# Altium PCB BMS breakout.PcbDoc
Units mm, origin at the board's own origin, x right, y up, seen from the top; angles counter-clockwise.
Board outline 83.46 x 150.11 mm, 2 copper layers (Top Layer, Bottom Layer); 55 components, 98 nets, 236 pads, 42 vias.
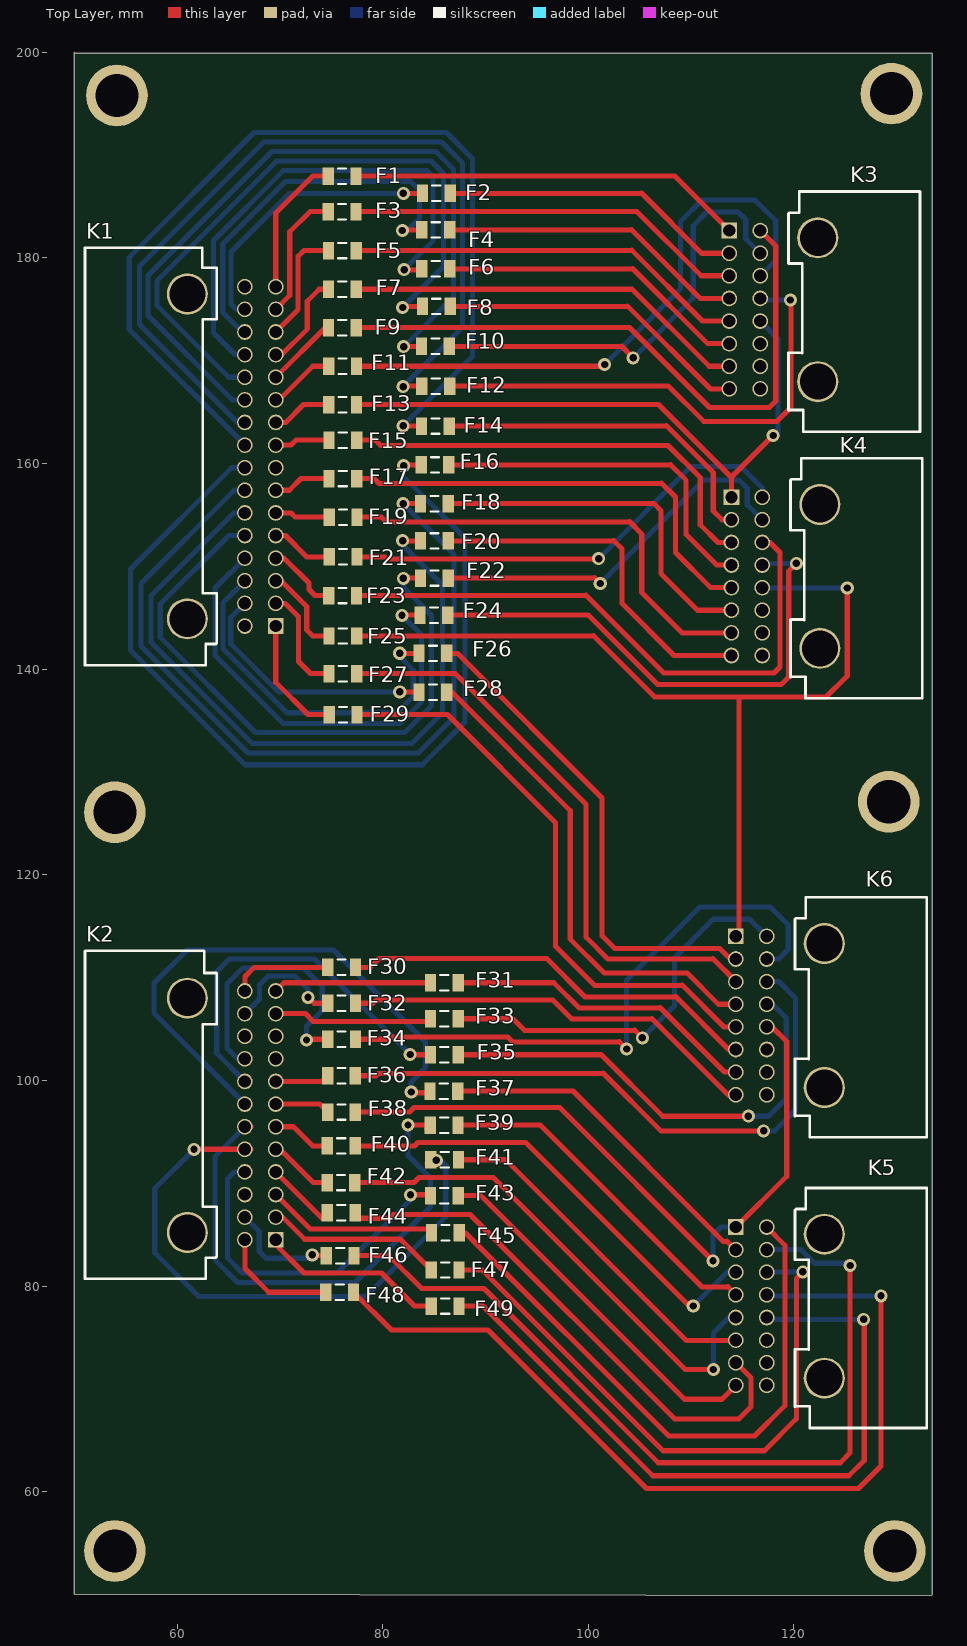
[diagram p0: Top Layer view]
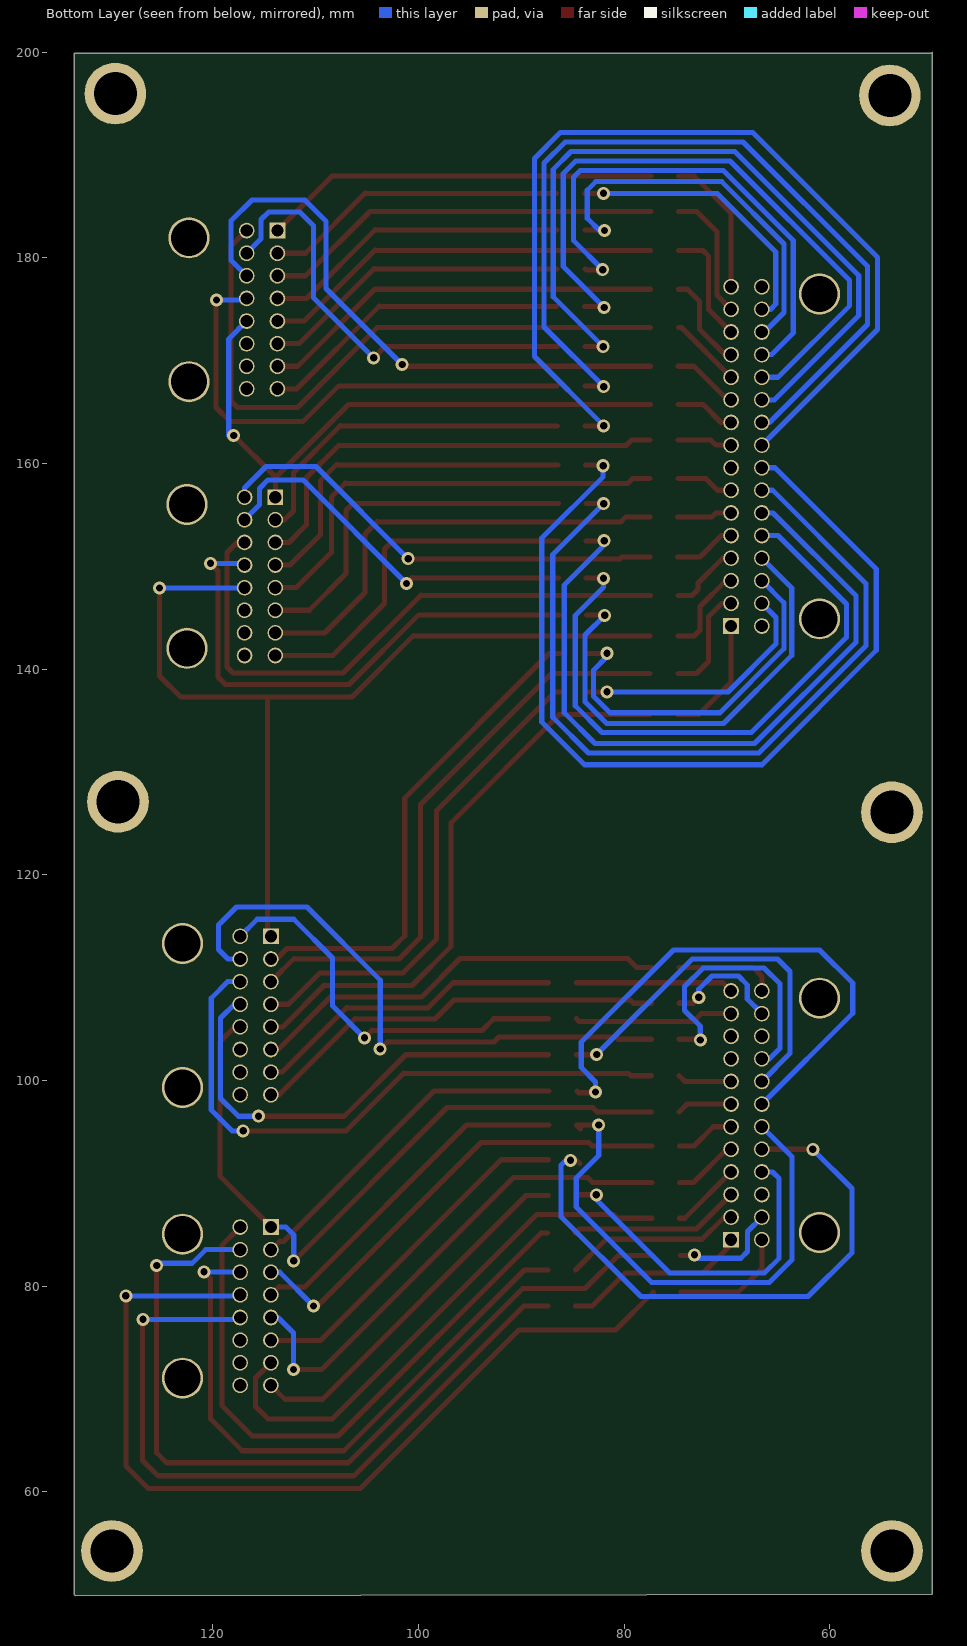
[diagram p1: Bottom Layer view, seen from below]

## Layer stack, top to bottom
Top Solder: solder mask 0.0102, Solder Resist, Dk 3.5
Top Layer: signal copper 0.0356
Dielectric 1: dielectric 0.32, FR-4, Dk 4.8
Bottom Layer: signal copper 0.0356
Bottom Solder: solder mask 0.0102, Solder Resist, Dk 3.5

## Board outline
50.013,50.013 50.013,200 50.114,199.898 133.477,199.898 133.477,49.987 133.375,49.886

## Design rules (kind name [scope] priority, off if disabled: settings)
Clearance [All] p1: gap=0.254 ignorepadtopadclearanceinfootprint=FALSE except(0: Arc-Hole Track-Hole SMDPad-Hole THPad-Hole Via-Hole Fill-Hole Poly-Hole Region-Hole Text-Hole; 0.152: Arc-THPad Track-THPad)
HoleSize [All] p1: absolutevalues=TRUE maxlimit=4.2 minlimit=0.025 maxpercent=80.000 minpercent=20.000
PolygonConnect [All] p1: connectstyle=Relief reliefconductorwidth=0.254 reliefentries=4 polygonreliefangle="90 Angle" airgapwidth=0.254
RoomDefinition Connectors [InComponentClass('Connectors')] p1: confinementstyle=ConfineIn formatcopy=TRUE lockcomponents=FALSE outline 133.045,50 50.013,50 50.013,199.898 133.045,199.898
RoutingVias [All] p1: holewidth=0.711 width=1.27 viastyle="Through Hole" minholewidth=0.711 minwidth=1.27 maxholewidth=0.711 maxwidth=1.27
SolderMaskExpansion [All] p1: expansion=0.102
Width [All] p1: maxlimit=0.5 minlimit=0.254 preferedwidth=0.254 minimp=50.000000 maximp=50.000000 favimp=50.000000
29 further rules are at their usual default settings.

## Components (designator, comment, footprint, x,y, rotation, side; value= is the part's Value field where it differs from the comment)
F1 "Fuse 1" C1206 76.048,187.96 r0 top
F2 "Fuse 1" C1206 85.217,186.284 r0 top
F3 "Fuse 1" C1206 76.048,184.506 r0 top
F4 "Fuse 1" C1206 85.166,182.728 r0 top
F5 "Fuse 1" C1206 76.073,180.721 r0 top
F6 "Fuse 1" C1206 85.166,178.943 r0 top
F7 "Fuse 1" C1206 76.073,176.962 r0 top
F8 "Fuse 1" C1206 85.217,175.285 r0 top
F9 "Fuse 1" C1206 76.073,173.228 r0 top
F10 "Fuse 1" C1206 85.137,171.399 r0 top
F11 "Fuse 1" C1206 76.098,169.469 r0 top
F12 "Fuse 1" C1206 85.166,167.538 r0 top
F13 "Fuse 1" C1206 76.098,165.735 r0 top
F14 "Fuse 1" C1206 85.137,163.652 r0 top
F15 "Fuse 1" C1206 76.124,162.281 r0 top
F16 "Fuse 1" C1206 85.09,159.868 r0 top
F17 "Fuse 1" C1206 76.124,158.547 r0 top
F18 "Fuse 1" C1206 85.039,156.108 r0 top
F19 "Fuse 1" C1206 76.149,154.788 r0 top
F20 "Fuse 1" C1206 85.039,152.476 r0 top
F21 "Fuse 1" C1206 76.149,150.927 r0 top
F22 "Fuse 1" C1206 85.039,148.869 r0 top
F23 "Fuse 1" C1206 76.098,147.168 r0 top
F24 "Fuse 1" C1206 84.988,145.263 r0 top
F25 "Fuse 1" C1206 76.124,143.231 r0 top
F26 "Fuse 1" C1206 84.887,141.529 r0 top
F27 "Fuse 1" C1206 76.124,139.573 r0 top
F28 "Fuse 1" C1206 84.887,137.77 r0 top
F29 "Fuse 1" C1206 76.153,135.585 r0 top
F30 "Fuse 1" C1206 76,111 r0 top
F31 "Fuse 1" C1206 86,109.5 r0 top
F32 "Fuse 1" C1206 76,107.5 r0 top
F33 "Fuse 1" C1206 86,106 r0 top
F34 "Fuse 1" C1206 76,104 r0 top
F35 "Fuse 1" C1206 86,102.5 r0 top
F36 "Fuse 1" C1206 75.997,100.457 r0 top
F37 "Fuse 1" C1206 85.95,98.958 r0 top
F38 "Fuse 1" C1206 75.997,96.926 r0 top
F39 "Fuse 1" C1206 85.979,95.656 r0 top
F40 "Fuse 1" C1206 75.971,93.624 r0 top
F41 "Fuse 1" C1206 86.03,92.278 r0 top
F42 "Fuse 1" C1206 75.946,90.068 r0 top
F43 "Fuse 1" C1206 86.004,88.798 r0 top
F44 "Fuse 1" C1206 75.971,87.122 r0 top
F45 "Fuse 1" C1206 86.106,85.166 r0 top
F46 "Fuse 1" C1206 75.87,82.956 r0 top
F47 "Fuse 1" C1206 86.081,81.559 r0 top
F48 "Fuse 1" C1206 75.819,79.4 r0 top
F49 "Fuse 1" C1206 86.081,78.054 r0 top
K1 "1318745-2" 1318745-2 66.6,144.2 r180 top
K2 "1318853-2" 1318853-2 66.6,84.5 r180 top
K3 "1318382-2" 1318382-2 116.723,182.666 r0 top
K4 "1318382-2" 1318382-2 116.926,156.732 r0 top
K5 "1318382-2" 1318382-2 117.358,85.739 r0 top
K6 "1318382-2" 1318382-2 117.358,114.009 r0 top

## Footprints (in the part's own frame and the unit in brackets; to place one, negate y for a bottom-side part, rotate by r counter-clockwise, add the part's x,y. Pads: shape width x height; smd on the part's side, far side on the other; paste and mask are expansions set on the pad)
1318382-2 [mm]
  rect 1.524x1.524 hole 1.2: 1(-3,0)
  round 1.524 hole 1.2: 2(-3,-2.2) 3(-3,-4.4) 4(-3,-6.6) 5(-3,-8.8) 6(-3,-11) 7(-3,-13.2) 8(-3,-15.4) 9(0,0) 10(0,-2.2) 11(0,-4.4) 12(0,-6.6) 13(0,-8.8) 14(0,-11) 15(0,-13.2) 16(0,-15.4)
  round 4 hole 3.5: 17(5.6,-0.7) 18(5.6,-14.7)
  silkscreen extent 2.75,-19.55 15.55,3.8, body extent 2.75,-19.55 15.55,3.8, height 15.5
1318745-2 [mm]
  rect 1.524x1.524 hole 1.2: 1(-3,0)
  round 1.524 hole 1.2: 2(-3,-2.2) 3(-3,-4.4) 4(-3,-6.6) 5(-3,-8.8) 6(-3,-11) 7(-3,-13.2) 8(-3,-15.4) 9(-3,-17.6) 10(-3,-19.8) 11(-3,-22) 12(-3,-24.2) 13(-3,-26.4) 14(-3,-28.6) 15(-3,-30.8) 16(-3,-33) 17(0,0) 18(0,-2.2) 19(0,-4.4) 20(0,-6.6) 21(0,-8.8) 22(0,-11) 23(0,-13.2) 24(0,-15.4) 25(0,-17.6) 26(0,-19.8) 27(0,-22) 28(0,-24.2) 29(0,-26.4) 30(0,-28.6) 31(0,-30.8) 32(0,-33)
  round 4 hole 3.5: 33(5.6,-32.3) 34(5.6,-0.7)
  silkscreen extent 2.75,-36.8 15.55,3.8, body extent 2.75,-36.8 15.55,3.8, height 15.5
1318853-2 [mm]
  rect 1.524x1.524 hole 1.2: 1(-3,0)
  round 1.524 hole 1.2: 2(-3,-2.2) 3(-3,-4.4) 4(-3,-6.6) 5(-3,-8.8) 6(-3,-11) 7(-3,-13.2) 8(-3,-15.4) 9(-3,-17.6) 10(-3,-19.8) 11(-3,-22) 12(-3,-24.2) 13(0,0) 14(0,-2.2) 15(0,-4.4) 16(0,-6.6) 17(0,-8.8) 18(0,-11) 19(0,-13.2) 20(0,-15.4) 21(0,-17.6) 22(0,-19.8) 23(0,-22) 24(0,-24.2)
  round 4 hole 3.5: 25(5.6,-0.7) 26(5.6,-23.5)
  silkscreen extent 2.75,-28.1 15.55,3.8, body extent 2.75,-28.1 15.55,3.8, height 15.5
C1206 [mm] "Chip Capacitor, Body 3.2x1.6mm, IPC High Density"
  rect 1.1x1.7 smd: 1(-1.35,0) 2(1.35,0)
  silkscreen extent -0.4,-0.75 0.4,0.75, body extent -1.7,-0.9 1.7,0.9, height 1.3

## Part data
F1 F2 F3 F4 F5 F6 F7 F8 F9 F10 F11 F12 F13 F14 F15 F16 F17 F18 F19 F20 F21 F22 F23 F24 F25 F26 F27 F28 F29 F30 F31 F32 F33 F34 F35 F36 F37 F38 F39 F40 F41 F42 F43 F44 F45 F46 F47 F48 F49: "Fuse", LatestRevisionDate=17-Jul-2002, LatestRevisionNote="Re-released for DXP Platform.", PackageDescription="Thru-Hole; 2 Leads", PackageReference=PIN-W2/E2.8, Published=8-Jun-2000, Publisher="Altium Limited"

## Free pads (board coordinates)
  round 6 hole 4.2: 2(53.95,54.229) 2(53.95,126.086) 2(54.153,195.809) 2(129.235,127.102) 2(129.489,195.986) 2(129.819,54.229)

## Via types
v1: diameter 1.27, hole 0.711, Top Layer to Bottom Layer, 42 vias

## Nets (pads, with @x,y where several pads share a name; then routed paths per layer and width w, separated by ;. In a path a pad name is that pad's centre, name@x,y a point inside that pad or via, vN(x,y) a via of type N, cw(c..) or ccw(c..) an arc to the next point about the centre after c; other vN are vias at no path point)
NetF1_1: F1.1 K1.16 | length 13.8
  Top Layer w0.5: K1.16 69.6,184.383 73.177,187.96 F1.1
NetF1_2: F1.2 K3.1 | length 38.5
  Top Layer w0.5: F1.2 108.377,187.96 108.403,187.985 K3.1
NetF2_1: F2.1 K1.31 | length 27.6
  Top Layer w0.5: v1(82.017,186.284) F2.1
  Bottom Layer w0.5: K1.31 65.767,175 65.253,175.514 65.253,180.594 70.942,186.284 v1(82.017,186.284)
NetF2_2: F2.2 K3.2 | length 29.6
  Top Layer w0.5: F2.2 105.152,186.284 105.178,186.309 111.021,180.466 K3.2
NetF3_1: F3.1 K1.15 | length 12.7
  Top Layer w0.5: K1.15 70.968,176.368 70.968,182.55 72.923,184.506 F3.1
NetF3_2: F3.2 K3.3 | length 38.9
  Top Layer w0.5: F3.2 104.695,184.506 104.72,184.531 110.986,178.266 K3.3
NetF4_1: F4.1 K1.30 | length 38.4
  Top Layer w0.5: v1(81.915,182.677) 81.966,182.728 F4.1
  Bottom Layer w0.5: K1.30 66.341,172.8 64.44,174.701 64.44,181.356 70.506,187.423 82.757,187.423 83.591,186.588 83.591,183.871 82.398,182.677 v1(81.915,182.677)
NetF4_2: F4.2 K3.4 | length 30
  Top Layer w0.5: F4.2 104.187,182.728 104.212,182.753 110.9,176.066 K3.4
NetF5_1: F5.1 K1.14 | length 11.4
  Top Layer w0.5: K1.14 71.78,174.98 71.78,180.162 72.339,180.721 F5.1
NetF5_2: F5.2 K3.5 | length 39.2
  Top Layer w0.5: F5.2 104.212,180.721 104.238,180.746 111.119,173.866 K3.5
NetF6_1: F6.1 K1.29 | length 49.6
  Top Layer w0.5: K1.29 K1.29@66.816,170.6 ; v1(82.093,178.867) 82.144,178.816 83.689,178.816 F6.1
  Bottom Layer w0.5: K1.29 65.647,170.6 63.551,172.696 63.551,181.712 70.333,188.493 84.303,188.493 84.912,187.884 84.912,181.686 v1(82.093,178.867)
NetF6_2: F6.2 K3.6 | length 30.2
  Top Layer w0.5: F6.2 104.289,178.943 104.314,178.968 111.617,171.666 K3.6
NetF7_1: F7.1 K1.13 | length 9.4
  Top Layer w0.5: K1.13 70.194,170.6 72.669,173.076 72.669,175.793 73.838,176.962 F7.1
NetF7_2: F7.2 K3.7 | length 39.4
  Top Layer w0.5: F7.2 104.212,176.962 104.238,176.987 111.759,169.466 K3.7
NetF8_1: F8.1 K1.28 | length 63.9
  Top Layer w0.5: K1.28 K1.28@66.8,168.4 ; v1(81.94,175.184) 82.042,175.285 F8.1
  Bottom Layer w0.5: K1.28 65.026,168.4 58.064,175.362 58.064,177.8 69.698,189.433 84.709,189.433 85.928,188.214 85.928,179.172 v1(81.94,175.184)
NetF8_2: F8.2 K3.8 | length 30.5
  Top Layer w0.5: F8.2 103.806,175.285 103.831,175.311 111.877,167.266 K3.8
NetF9_1: F9.1 K1.12 | length 7.1
  Top Layer w0.5: K1.12 74.428,173.228 F9.1
NetF9_2: F9.2 K3.9 | length 61.5
  Top Layer w0.5: F9.2 104.009,173.228 111.782,165.456 117.598,165.456 118.233,166.091 118.233,181.155 K3.9
NetF10_1: F10.1 K1.27 | length 73.1
  Top Layer w0.5: v1(82.042,171.374) 82.067,171.399 F10.1
  Bottom Layer w0.5: K1.27 65.372,166.2 57.175,174.396 57.175,178.283 69.24,190.348 85.166,190.348 86.893,188.62 86.893,176.225 v1(82.042,171.374)
NetF10_2: F10.2 K3.10 | length 43.5
  Top Layer w0.5: F10.2 103.196,171.399 103.222,171.425 v1(104.365,170.282)
  Bottom Layer w0.5: v1(104.365,170.282) 110.207,176.124 110.207,183.134 111.553,184.48 114.576,184.48 115.312,183.744 115.312,181.876 K3.10
NetF11_1: F11.1 K1.11 | length 6.5
  Top Layer w0.5: K1.11 69.934,166.2 73.203,169.469 F11.1
NetF11_2: F11.2 K3.11 | length 58.1
  Top Layer w0.5: F11.2 101.418,169.469 v1(101.596,169.647)
  Bottom Layer w0.5: v1(101.596,169.647) 108.988,177.038 108.988,183.566 111.07,185.649 116.201,185.649 118.233,183.617 118.233,179.776 K3.11
NetF12_1: F12.1 K1.26 | length 83.2
  Top Layer w0.5: v1(81.991,167.488) 82.042,167.538 F12.1
  Bottom Layer w0.5: K1.26 65.87,164 56.337,173.533 56.337,179.197 68.428,191.287 85.725,191.287 87.782,189.23 87.782,173.279 v1(81.991,167.488)
NetF12_2: F12.2 K3.12 | length 48.7
  Top Layer w0.5: F12.2 107.743,167.538 107.768,167.564 111.223,164.109 118.36,164.109 119.706,165.456 119.706,175.87 v1(119.656,175.92)
  Bottom Layer w0.5: K3.12 116.868,175.92 v1(119.656,175.92)
NetF13_1: F13.1 K1.10 | length 5.9
  Top Layer w0.5: K1.10 70.579,164 72.314,165.735 F13.1
NetF13_2: F13.2 K3.13 K4.1 | length 59.4
  Top Layer w0.5: F13.2 106.824,165.735 113.926,158.634 K4.1 ; 113.926,158.684 v1(117.979,162.738)
  Bottom Layer w0.5: K3.13 118.462,172.126 118.462,162.738 v1(117.979,162.738)
NetF14_1: F14.1 K1.25 | length 93
  Top Layer w0.5: v1(81.991,163.678) 82.017,163.652 F14.1
  Bottom Layer w0.5: K1.25 55.347,173.053 55.347,180.061 67.488,192.202 86.208,192.202 88.722,189.687 88.722,170.409 v1(81.991,163.678)
NetF14_2: F14.2 K4.2 | length 33.4
  Top Layer w0.5: F14.2 107.591,163.652 107.616,163.678 112.163,159.131 112.163,155.397 113.028,154.532 K4.2
NetF15_1: F15.1 K1.9 | length 5.4
  Top Layer w0.5: K1.9 71.097,161.8 71.577,162.281 F15.1
NetF15_2: F15.2 K4.3 | length 43.3
  Top Layer w0.5: F15.2 79.273,162.281 79.807,161.747 107.743,161.747 107.768,161.773 110.893,158.648 110.893,154.051 112.611,152.332 K4.3
NetF16_1: F16.1 K1.24 | length 91.1
  Top Layer w0.5: v1(82.042,159.791) 82.118,159.868 F16.1
  Bottom Layer w0.5: K1.24 65.315,159.6 55.474,149.758 55.474,141.834 66.599,130.708 83.845,130.708 88.011,134.874 88.011,152.756 82.042,158.725 v1(82.042,159.791)
NetF16_2: F16.2 K4.4 | length 34.6
  Top Layer w0.5: F16.2 107.972,159.868 107.997,159.893 109.521,158.369 109.521,153.111 112.5,150.132 K4.4
NetF17_1: F17.1 K1.7 | length 5.6
  Top Layer w0.5: K1.7 70.913,157.4 72.06,158.547 F17.1
NetF17_2: F17.2 K4.5 | length 44
  Top Layer w0.5: F17.2 79.172,158.547 79.654,158.064 107.108,158.064 107.133,158.09 108.48,156.743 108.48,151.359 111.906,147.932 K4.5
NetF18_1: F18.1 K1.23 | length 80.7
  Top Layer w0.5: v1(81.991,156.108) F18.1
  Bottom Layer w0.5: K1.23 65.554,157.4 56.49,148.336 56.49,142.265 66.904,131.851 83.464,131.851 86.944,135.331 86.944,151.155 v1(81.991,156.108)
NetF18_2: F18.2 K4.6 | length 35.5
  Top Layer w0.5: F18.2 106.346,156.108 106.371,156.134 107.057,155.448 107.057,149.301 110.626,145.732 K4.6
NetF19_1: F19.1 K1.6 | length 5.4
  Top Layer w0.5: K1.6 71.089,155.2 71.501,154.788 F19.1
NetF19_2: F19.2 K4.7 | length 44.4
  Top Layer w0.5: F19.2 79.883,154.788 80.34,154.33 103.984,154.33 104.009,154.356 105.203,153.162 105.203,147.472 109.143,143.532 K4.7
NetF20_1: F20.1 K1.22 | length 70.8
  Top Layer w0.5: v1(81.94,152.502) 81.966,152.476 F20.1
  Bottom Layer w0.5: K1.22 65.513,155.2 57.455,147.142 57.455,142.621 67.31,132.766 82.829,132.766 85.827,135.763 85.827,148.184 81.94,152.07 v1(81.94,152.502)
NetF20_2: F20.2 K4.8 | length 35.3
  Top Layer w0.5: F20.2 102.46,152.476 102.485,152.502 103.298,151.689 103.298,146.38 108.346,141.332 K4.8
NetF21_1: F21.1 K1.5 | length 6.1
  Top Layer w0.5: K1.5 70.545,153 72.619,150.927 F21.1
NetF21_2: F21.2 K4.9 | length 45
  Top Layer w0.5: F21.2 80.213,150.927 80.416,150.724 100.987,150.724 v1(101.012,150.749)
  Bottom Layer w0.5: v1(101.012,150.749) 109.978,159.715 114.83,159.715 116.926,157.619 K4.9
NetF22_1: F22.1 K1.21 | length 60.7
  Top Layer w0.5: v1(82.017,148.844) 82.042,148.869 F22.1
  Bottom Layer w0.5: K1.21 65.04,153 58.369,146.329 58.369,143.104 67.64,133.833 82.144,133.833 84.76,136.449 84.76,145.237 82.017,147.98 v1(82.017,148.844)
NetF22_2: F22.2 K4.10 | length 37.5
  Top Layer w0.5: F22.2 100.58,148.869 100.606,148.895 v1(101.164,148.336)
  Bottom Layer w0.5: v1(101.164,148.336) 111.248,158.42 114.63,158.42 115.465,157.585 115.465,155.993 K4.10
NetF23_1: F23.1 K1.4 | length 7
  Top Layer w0.5: K1.4 70.409,150.8 72.822,148.387 72.822,147.752 73.406,147.168 F23.1
NetF23_2: F23.2 K4.11 | length 57.8
  Top Layer w0.5: F23.2 99.742,147.168 99.767,147.193 107.337,139.624 118.055,139.624 118.64,140.208 118.64,151.359 117.666,152.332 K4.11
NetF24_1: F24.1 K1.20 | length 45.3
  Top Layer w0.5: v1(81.89,145.237) 81.915,145.263 F24.1
  Bottom Layer w0.5: K1.20 63.703,147.903 63.703,141.351 70.333,134.722 81.686,134.722 83.795,136.83 83.795,143.332 v1(81.89,145.237)
NetF24_2: F24.2 K4.12 | length 51
  Top Layer w0.5: F24.2 99.945,145.263 99.971,145.288 106.752,138.506 118.767,138.506 119.503,139.243 119.503,149.555 v1(120.24,150.292)
  Bottom Layer w0.5: K4.12 117.085,150.292 v1(120.24,150.292)
NetF25_1: F25.1 K1.3 | length 8.7
  Top Layer w0.5: K1.3 70.119,148.6 72.619,146.101 72.619,143.815 73.203,143.231 F25.1
NetF25_2: F25.2 K4.13 K6.1 | length 91.3
  Top Layer w0.5: F25.2 100.479,143.231 100.504,143.256 106.473,137.287 114.677,137.287 ; K6.1 114.677,114.329 114.677,137.287 ; v1(125.193,147.904) 125.193,139.344 123.135,137.287 114.677,137.287
  Bottom Layer w0.5: K4.13 116.954,147.904 v1(125.193,147.904)
NetF26_1: F26.1 K1.19 | length 35.9
  Top Layer w0.5: v1(81.661,141.554) 81.686,141.529 F26.1
  Bottom Layer w0.5: K1.19 64.465,146.465 64.465,141.986 70.688,135.763 81.382,135.763 82.982,137.363 82.982,139.903 81.661,141.224 v1(81.661,141.554)
NetF26_2: F26.2 K6.2 | length 48.3
  Top Layer w0.5: F26.2 87.3,141.529 101.346,127.483 101.346,114.071 102.581,112.837 112.791,112.837 113.819,111.809 K6.2
NetF27_1: F27.1 K1.2 | length 10.6
  Top Layer w0.5: K1.2 70.516,146.4 71.806,145.11 71.806,140.741 72.974,139.573 F27.1
NetF27_2: F27.2 K6.3 | length 56.9
  Top Layer w0.5: F27.2 87.071,139.573 99.797,126.848 99.797,113.919 101.905,111.811 112.105,111.811 112.131,111.836 K6.3
NetF28_1: F28.1 K1.18 | length 24.8
  Top Layer w0.5: v1(81.661,137.795) 81.686,137.77 F28.1
  Bottom Layer w0.5: K1.18 65.219,145.019 65.219,142.477 69.901,137.795 v1(81.661,137.795)
NetF28_2: F28.2 K6.4 | length 48
  Top Layer w0.5: F28.2 86.716,137.77 98.247,126.238 98.247,113.741 101.524,110.465 109.597,110.465 112.652,107.409 K6.4
NetF29_1: F29.1 K1.1 | length 12
  Top Layer w0.5: K1.1 69.6,138.731 72.746,135.585 F29.1
NetF29_2: F29.2 K6.5 | length 56.5
  Top Layer w0.5: F29.2 86.309,135.585 96.825,125.07 96.825,113.055 100.635,109.245 109.115,109.245 109.14,109.271 113.201,105.209 K6.5
NetF30_1: F30.1 K2.24 | length 9.8
  Top Layer w0.5: K2.24 66.6,110.1 67.5,111 F30.1
NetF30_2: F30.2 K6.6 | length 41.1
  Top Layer w0.5: F30.2 78.793,111 79.654,111.862 95.961,111.862 99.695,108.128 108.48,108.128 108.505,108.153 113.649,103.009 K6.6
NetF31_1: F31.1 K2.12 | length 15.4
  Top Layer w0.5: K2.12 70.4,109.5 F31.1
NetF31_2: F31.2 K6.7 | length 30.6
  Top Layer w0.5: F31.2 96.646,109.5 99.085,107.061 106.956,107.061 106.981,107.086 113.258,100.809 K6.7
NetF32_1: F32.1 K2.23 | length 12.1
  Top Layer w0.5: v1(72.746,108.077) 73.323,107.5 F32.1 F32.1@74.556,107.594
  Bottom Layer w0.5: K2.23 68.021,107.921 68.021,109.296 68.885,110.16 71.45,110.16 72.746,108.864 v1(72.746,108.077)
NetF32_2: F32.2 K6.8 | length 41
  Top Layer w0.5: F32.2 79.077,107.5 79.4,107.823 96.545,107.823 98.4,105.969 106.168,105.969 106.194,105.994 113.578,98.609 K6.8
NetF33_1: F33.1 K2.11 | length 15.5
  Top Layer w0.5: K2.11 72.494,106.5 73.254,105.74 84.39,105.74 F33.1
NetF33_2: F33.2 K6.9 | length 39
  Top Layer w0.5: F33.2 92.679,106 93.828,104.851 104.492,104.851 104.517,104.877 v1(105.254,104.14)
  Bottom Layer w0.5: v1(105.254,104.14) 108.378,107.264 108.378,111.912 112.137,115.672 115.695,115.672 K6.9
NetF34_1: F34.1 K2.21 | length 27
  Top Layer w0.5: v1(72.593,103.937) 72.656,104 F34.1
  Bottom Layer w0.5: K2.21 65.87,102.1 64.846,103.124 64.846,109.398 66.396,110.947 72.314,110.947 74.117,109.144 74.117,106.807 72.593,105.283 v1(72.593,103.937)
NetF34_2: F34.2 K6.10 | length 57.9
  Top Layer w0.5: F34.2 80.607,104 80.823,104.216 92.177,104.216 92.659,103.734 102.993,103.734 103.019,103.759 v1(103.73,103.048)
  Bottom Layer w0.5: v1(103.73,103.048) 103.73,109.753 110.842,116.865 117.7,116.865 119.452,115.113 119.452,112.725 118.537,111.809 K6.10
NetF35_1: F35.1 K2.20 | length 37.2
  Top Layer w0.5: K2.20 K2.20@66.778,99.9 ; v1(82.677,102.514) 82.691,102.5 F35.1
  Bottom Layer w0.5: K2.20 63.856,102.644 63.856,110.592 65.075,111.811 73.381,111.811 v1(82.677,102.514)
NetF35_2: F35.2 K6.12 | length 45.4
  Top Layer w0.5: F35.2 101.204,102.5 101.23,102.525 107.235,96.52 v1(115.566,96.52)
  Bottom Layer w0.5: v1(115.566,96.52) 117.522,96.52 119.253,98.251 119.253,106.067 117.91,107.409 K6.12
NetF36_1: F36.1 K2.8 | length 5.3
  Top Layer w0.5: K2.8 74.09,99.9 F36.1
NetF36_2: F36.2 K6.11 | length 60.4
  Top Layer w0.5: F36.2 79.35,100.457 79.578,100.686 101.418,100.686 101.444,100.711 107.057,95.098 v1(117.065,95.098)
  Bottom Layer w0.5: v1(117.065,95.098) 118.135,95.098 120.167,97.13 120.167,108.001 118.559,109.609 K6.11
NetF37_1: F37.1 K2.19 | length 54.4
  Top Layer w0.5: K2.19 K2.19@66.737,97.7 ; v1(82.779,98.882) 82.855,98.806 84.447,98.806 F37.1
  Bottom Layer w0.5: K2.19 57.76,106.54 57.76,109.474 60.985,112.7 75.209,112.7 84.176,103.734 84.176,101.244 82.779,99.847 v1(82.779,98.882)
NetF37_2: F37.2 K5.2 | length 33.4
  Top Layer w0.5: F37.2 98.501,98.958 113.132,84.328 113.513,84.328 ; 113.493,84.353 K5.2@114.307,83.539
NetF38_1: F38.1 K2.7 | length 5.4
  Top Layer w0.5: K2.7 73.873,97.7 F38.1
NetF38_2: F38.2 K5.1 K6.13 | length 68.8
  Top Layer w0.5: F38.2 82.626,96.926 83.058,97.358 97.231,97.358 v1(112.141,82.448) ; K5.1 119.3,90.682 119.3,103.784 117.875,105.209 K6.13
  Bottom Layer w0.5: v1(112.141,82.448) 112.141,84.963 112.917,85.739 K5.1
NetF39_1: F39.1 K2.18 | length 51.2
  Top Layer w0.5: K2.18 K2.18@67.179,95.5 ; v1(82.474,95.656) F39.1 F39.1@84.273,95.301
  Bottom Layer w0.5: K2.18 63.678,92.578 63.678,82.55 65.888,80.34 77.318,80.34 84.658,87.681 84.658,90.5 82.474,92.685 v1(82.474,95.656)
NetF39_2: F39.2 K5.4 | length 33.9
  Top Layer w0.5: F39.2 95.326,95.656 111.074,79.908 113.538,79.908 113.563,79.934 K5.4
NetF40_1: F40.1 K2.6 | length 5.8
  Top Layer w0.5: K2.6 71.327,95.5 73.203,93.624 F40.1
NetF40_2: F40.2 K5.3 | length 45.1
  Top Layer w0.5: F40.2 83.109,93.624 83.439,93.955 93.929,93.955 109.83,78.054 v1(110.211,78.054)
  Bottom Layer w0.5: v1(110.211,78.054) 113.496,81.339 K5.3
NetF41_1: F41.1 K2.17 | length 57.1
  Top Layer w0.254: v1(61.646,93.294) v1@61.652,93.3
  Top Layer w0.5: v1@61.652,93.3 K2.17 K2.17@67.163,93.3 ; F41.1@84.324,91.923 F41.1
  Bottom Layer w0.254: v1(85.217,92.227) v1@85.649,92.227
  Bottom Layer w0.5: v1(61.646,93.294) 57.836,89.484 57.836,83.236 62.103,78.969 78.359,78.969 86.131,86.741 86.131,91.745 v1@85.649,92.227
NetF41_2: F41.2 K5.6 | length 34.3
  Top Layer w0.5: F41.2 91.973,92.278 109.538,74.714 114.332,74.714 K5.6
NetF42_1: F42.1 K2.5 | length 6.3
  Top Layer w0.5: K2.5 70.022,93.3 73.254,90.068 F42.1
NetF42_2: F42.2 K5.5 | length 49.2
  Top Layer w0.5: F42.2 83.058,90.068 83.541,90.551 90.754,90.551 109.423,71.882 v1(112.166,71.882)
  Bottom Layer w0.5: v1(112.166,71.882) 112.166,75.438 113.668,76.939 K5.5
NetF43_1: F43.1 K2.16 | length 33.9
  Top Layer w0.5: K2.16 K2.16@66.995,91.1 ; v1(82.702,88.875) 84.578,88.875 F43.1
  Bottom Layer w0.5: K2.16 65.573,91.1 64.922,90.449 64.922,82.702 66.37,81.255 75.565,81.255 82.702,88.392 v1(82.702,88.875)
NetF43_2: F43.2 K5.8 | length 35.8
  Top Layer w0.5: F43.2 89.535,88.798 109.347,68.986 113.005,68.986 K5.8
NetF44_1: F44.1 K2.4 | length 6.9
  Top Layer w0.5: K2.4 74.111,86.589 F44.1@74.621,86.589
NetF44_2: F44.2 K5.7 | length 52.3
  Top Layer w0.5: F44.2@77.321,86.589 80.645,86.589 81.026,86.97 88.494,86.97 108.382,67.081 114.652,67.081 115.846,68.275 115.846,71.051 K5.7
NetF45_1: F45.1 K2.3 | length 16.7
  Top Layer w0.5: K2.3 72.953,85.547 84.375,85.547 F45.1
NetF45_2: F45.2 K5.9 | length 59.2
  Top Layer w0.5: F45.2 88.062,85.166 107.823,65.405 116.176,65.405 119.122,68.351 119.122,83.975 K5.9
NetF46_1: F46.1 K2.14 | length 10.9
  Top Layer w0.5: v1(73.152,83.033) 73.228,82.956 F46.1
  Bottom Layer w0.5: K2.14 67.996,85.304 67.996,83.363 68.656,82.702 72.796,82.702 73.127,83.033 v1(73.152,83.033)
NetF46_2: F46.2 K5.10 | length 84
  Top Layer w0.5: F46.2 80.594,82.956 83.795,79.756 89.865,79.756 106.807,62.814 124.507,62.814 125.472,63.779 v1(125.472,81.991)
  Bottom Layer w0.5: K5.10 120.698,83.539 122.018,82.22 125.244,82.22 v1(125.472,81.991)
NetF47_1: F47.1 K2.2 | length 17.3
  Top Layer w0.5: K2.2 70.272,86.7 72.415,84.557 81.733,84.557 F47.1
NetF47_2: F47.2 K5.11 | length 59.5
  Top Layer w0.5: F47.2 89.687,81.559 107.264,63.983 117.141,63.983 120.24,67.081 120.24,80.747 v1(120.875,81.382)
  Bottom Layer w0.5: K5.11 117.4,81.382 v1(120.875,81.382)
NetF48_1: F48.1 K2.13 | length 11.6
  Top Layer w0.5: K2.13 66.6,81.711 68.91,79.4 F48.1
NetF48_2: F48.2 K5.12 | length 87.8
  Top Layer w0.5: F48.2 80.852,75.717 90.246,75.717 105.664,60.3 126.285,60.3 128.469,62.484 v1(128.469,79.045)
  Bottom Layer w0.5: K5.12 117.452,79.045 v1(128.469,79.045)
NetF49_1: F49.1 K2.1 | length 18.1
  Top Layer w0.5: K2.1 69.6,84.019 72.339,81.28 79.883,81.28 83.109,78.054 F49.1
NetF49_2: F49.2 K5.13 | length 70.1
  Top Layer w0.5: F49.2 89.764,78.054 106.274,61.544 125.345,61.544 126.844,63.043 126.844,76.708 v1(126.793,76.759)
  Bottom Layer w0.5: K5.13 117.538,76.759 v1(126.793,76.759)
pads on no net: K1.8 K1.17 K1.32 K1.33 K1.34 K2.9 K2.10 K2.15 K2.22 K2.25 K2.26 K3.14 K3.15 K3.16 K3.17 K3.18 K4.14 K4.15 K4.16 K4.17 K4.18 K5.14 K5.15 K5.16 K5.17 K5.18 K6.14 K6.15 K6.16 K6.17 K6.18

## Silkscreen, mask and mechanical layers (free items; w line width, h text height)
Mechanical 2:
  lines w0.254: 49.987,49.911 133.452,49.911 133.477,49.936 133.477,199.873 133.452,199.898 49.987,199.898 49.987,49.911